# Altium PCB NonRGB-v1.PcbDoc (part 2 of 2)
Units mil, origin at the board's own origin, x right, y up, seen from the top; angles counter-clockwise.
Board outline 14224 x 14224 mil, 4 copper layers (Top Layer, Internal Plane 1, Internal Plane 2, Bottom Layer), stack 18.2 mil thick; 328 components, 111 nets, 825 pads, 445 vias.
Unrouted connection lines stored in the file: 71.
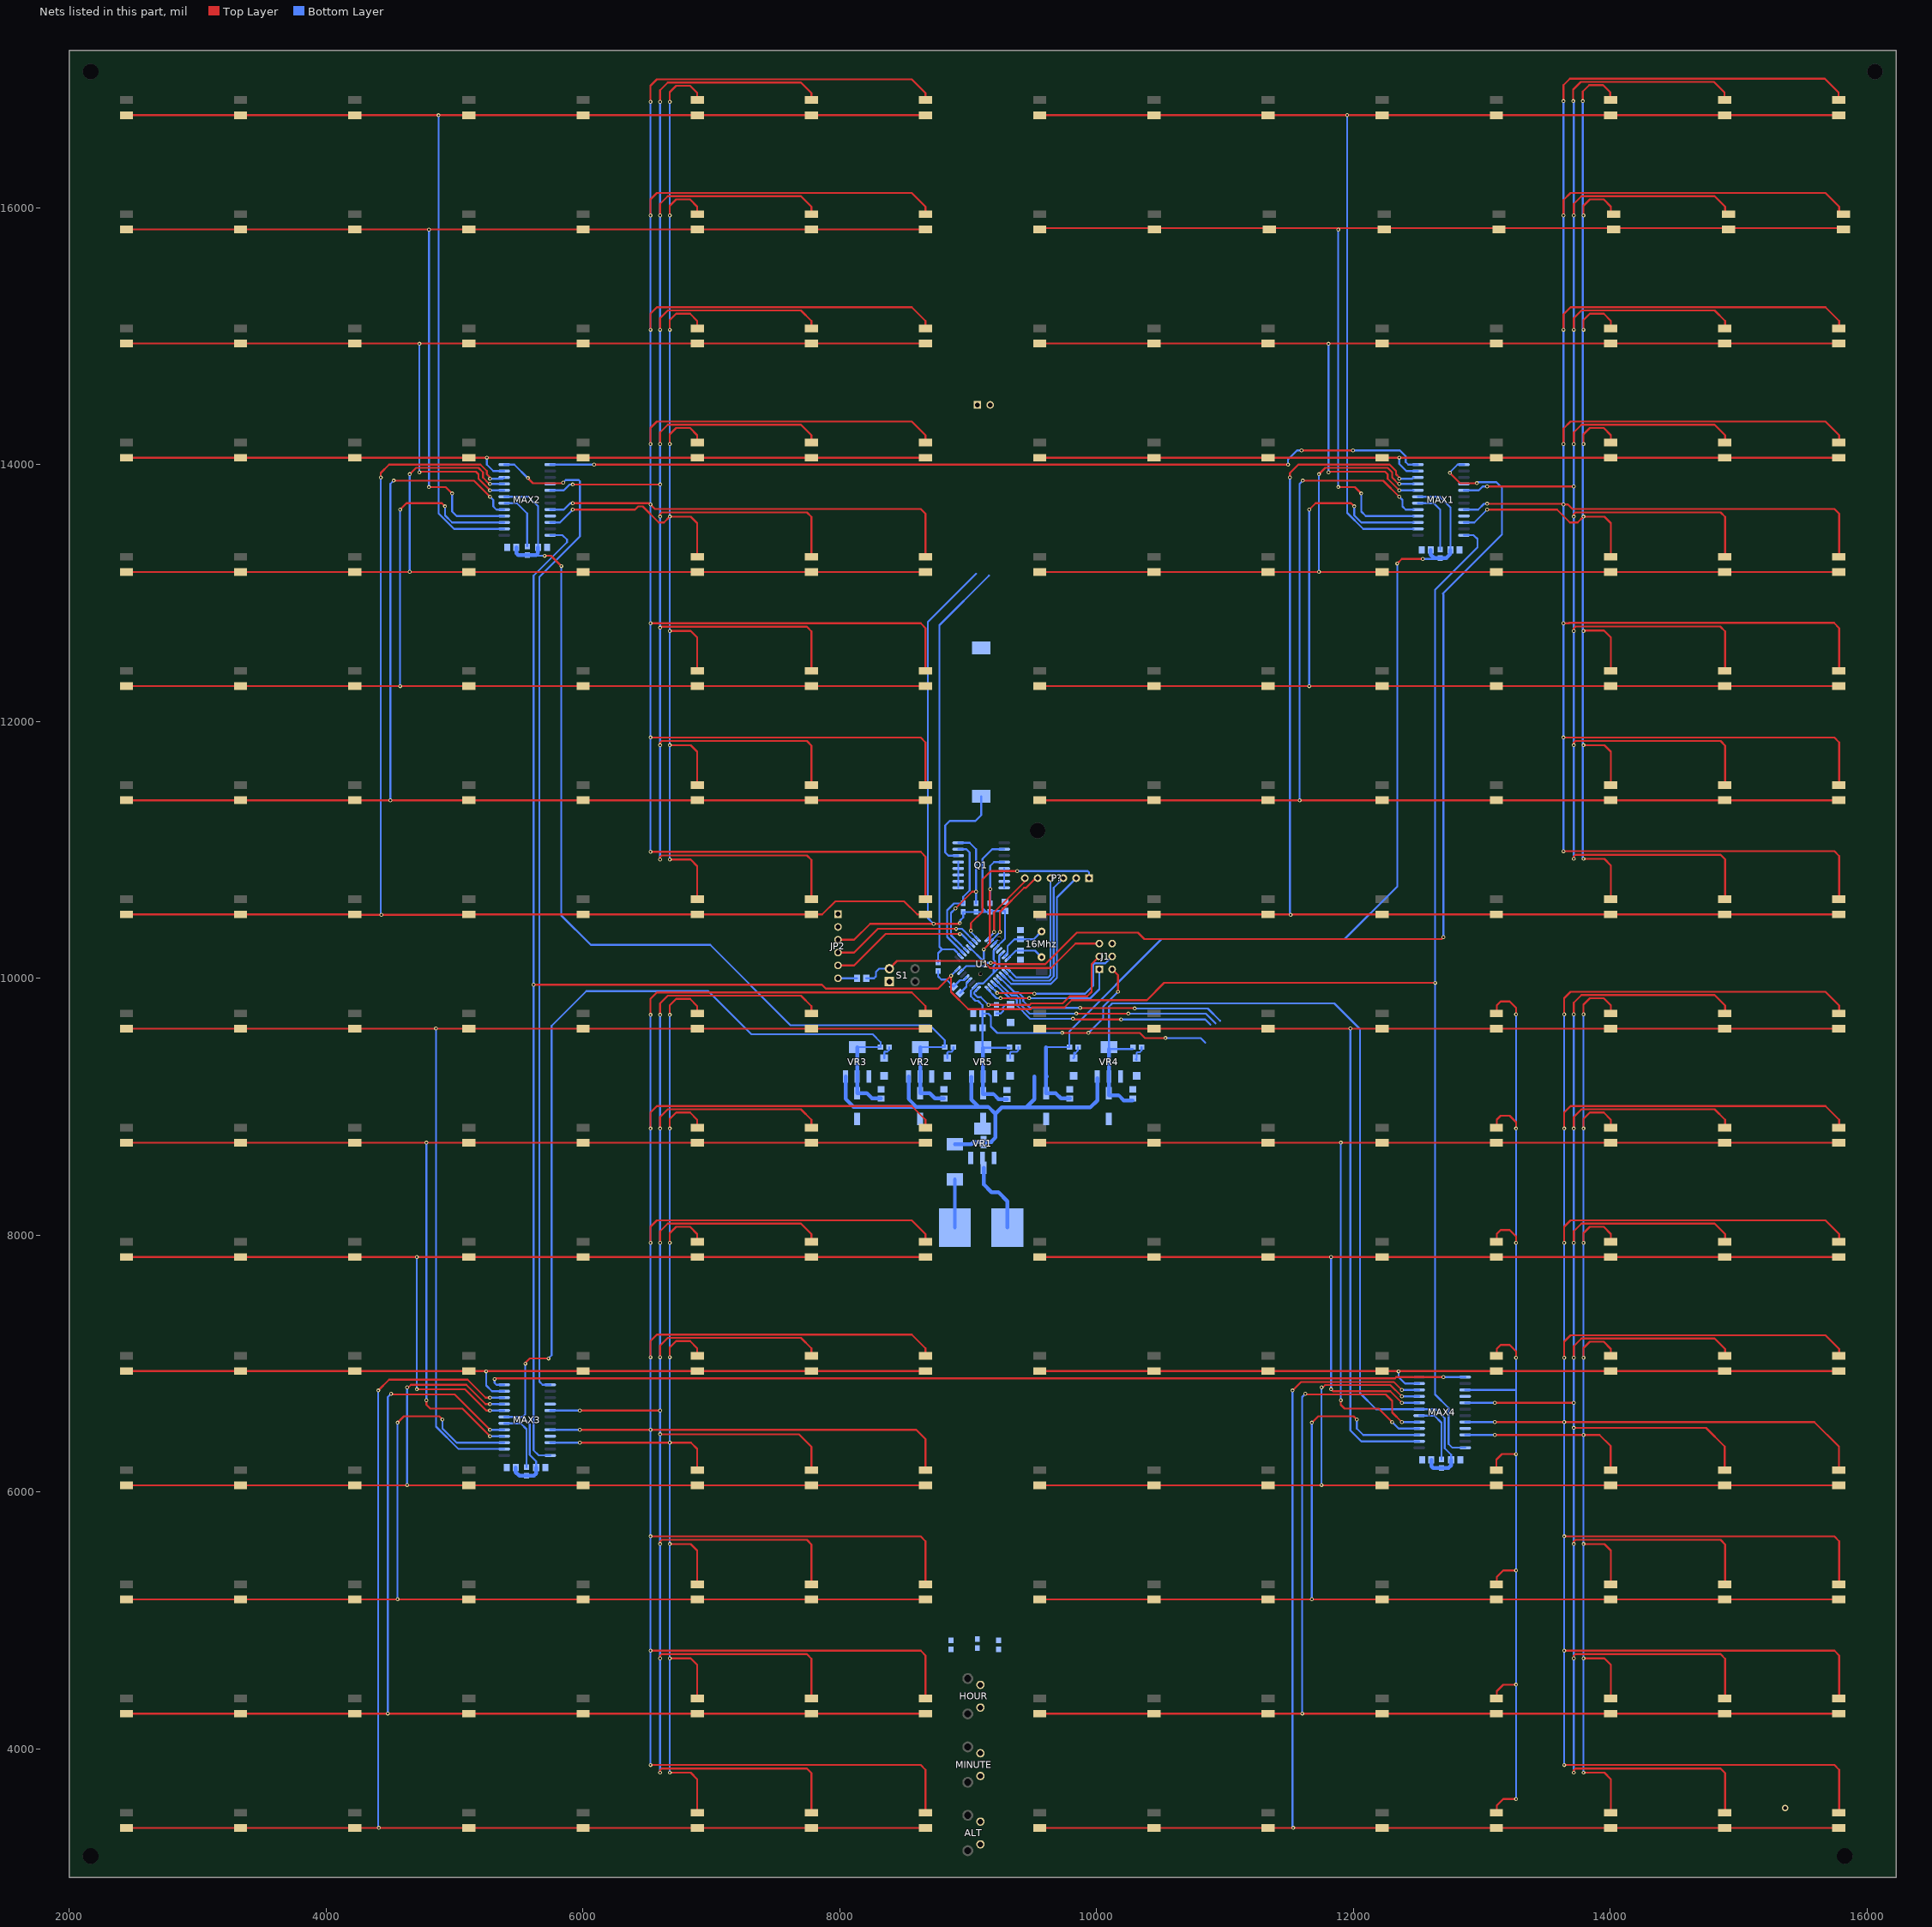
[diagram p4: the nets of this part, all layers, seen from the top]

## Via types
v1: diameter 30, hole 15, Top Layer to Bottom Layer, 442 vias
v2: diameter 30, hole 28, Top Layer to Bottom Layer, 2 vias
v3: diameter 50, hole 28, Top Layer to Bottom Layer, 1 vias

## Nets (pads, with @x,y where several pads share a name; then routed paths per layer and width w, separated by ;. In a path a pad name is that pad's centre, name@x,y a point inside that pad or via, vN(x,y) a via of type N, cw(c..) or ccw(c..) an arc to the next point about the centre after c; other vN are vias at no path point) (continued)
DIG4C: LED197.2 LED205.2 LED213.2 LED221.2 LED229.2 LED237.2 LED245.2 LED253.2 MAX4.3 | length 8591.9
  Top Layer w15: LED229.2@13112,6170.56 13112,6252 13155,6295 v1(13265,6295) ; LED253.2@13115,3505.56 13115,3560 13165,3610 v1(13265,3610) ; LED245.2@13115,4395.56 13115,4450 13165,4500 v1(13265,4500) ; LED237.2@13115,5285.56 13115,5340 13165,5390 v1(13265,5390) ; LED221.2@13115,7058.56 13115,7115 13145,7145 13215,7145 13265,7095 v1(13265,7045) ; LED213.2@13115,7953.56 13115,8010 13145,8040 13215,8040 13265,7990 v1(13265,7940) ; LED205.2@13115,8843.56 13115,8900 13145,8930 13215,8930 13265,8880 v1(13265,8830) ; LED197.2@13115,9733.56 13115,9790 13145,9820 13215,9820 13265,9770 v1(13265,9720)
  Bottom Layer w15: MAX4.3@12869.13,6795 13265,6795 ; v1(13265,3610) v1(13265,4500) v1(13265,5390) v1(13265,6295) 13265,6795 ; v1(13265,9720) v1(13265,8830) v1(13265,7940) v1(13265,7045) 13265,6795
DIG5: LED6.2 LED14.2 LED22.2 LED30.2 LED38.2 LED46.2 LED54.2 LED62.2 MAX1.10 | length 10457.1
  Top Layer w15: v1(13040,13650) 13585,13650 13685,13550 13745,13550 v1(13790,13595) 13953,13595 14004,13544 LED38.2@14004,13285.56 ; v1(13785,16830) 13785,16905 13835,16955 13943,16955 13999,16899 LED6.2@13999,16843.56 ; v1(13790,10930) 13953,10930 14004,10879 LED62.2@14004,10620.56 ; v1(13790,11815) 13953,11815 14004,11764 LED54.2@14004,11505.56 ; v1(13790,12705) 13792.5,12707.5 13950.5,12707.5 14004,12654 LED46.2@14004,12395.56 ; v1(13790,14160) 13790,14235 13840,14285 13948,14285 14004,14229 LED30.2@14004,14173.56 ; v1(13790,15050) 13790,15125 13840,15175 13948,15175 14004,15119 LED22.2@14004,15063.56 ; v1(13790,15940) 13790,16015 13840,16065 13948,16065 14004,16009 LED14.2@14004,15953.56
  Bottom Layer w15: MAX1.10@12859.13,13550 12940,13550 v1(13040,13650) ; v1@13785,10935 v1(13785,16830)
DIG5A: LED70.2 LED78.2 LED86.2 LED94.2 LED102.2 LED110.2 LED118.2 LED126.2 MAX2.10 | length 10480.7
  Top Layer w15: v1(5920,13650) 6405,13650 6430,13675 6465,13675 6590,13550 6630,13550 v1(6675,13595) 6838,13595 6889,13544 LED102.2@6889,13285.56 ; v1(6675,10925) 6838,10925 6889,10874 LED126.2@6889,10615.56 ; v1(6675,11815) 6838,11815 6889,11764 LED118.2@6889,11505.56 ; v1(6675,12705) 6838,12705 6889,12654 LED110.2@6889,12395.56 ; v1(6675,14160) 6675,14235 6725,14285 6833,14285 6889,14229 LED94.2@6889,14173.56 ; v1(6675,15050) 6675,15125 6725,15175 6833,15175 6889,15119 LED86.2@6889,15063.56 ; v1(6675,15940) 6675,16015 6725,16065 6833,16065 6889,16009 LED78.2@6889,15953.56 ; v1(6675,16825) 6675,16900 6725,16950 6833,16950 6889,16894 LED70.2@6889,16838.56
  Bottom Layer w15: MAX2.10@5744.13,13550 5820,13550 v1(5920,13650) ; v1(6675,10925) v1(6675,11815) v1(6675,12705) v1(6675,13595) v1(6675,14160) v1(6675,15050) v1(6675,15940) v1(6675,16825)
DIG5B: LED134.2 LED142.2 LED150.2 LED158.2 LED166.2 LED174.2 LED182.2 LED190.2 MAX3.10 | length 10264.7
  Top Layer w15: v1(5975,6385) v1(6675,6385) 6840,6385 6889,6336 LED166.2@6889,6170.56 ; v1(6675,3815) 6838,3815 6889,3764 LED190.2@6889,3505.56 ; v1(6675,4705) 6838,4705 6889,4654 LED182.2@6889,4395.56 ; v1(6675,5595) 6838,5595 6889,5544 LED174.2@6889,5285.56 ; v1(6675,7050) 6675,7125 6725,7175 6833,7175 6889,7119 LED158.2@6889,7063.56 ; v1(6675,7940) 6675,8015 6725,8065 6833,8065 6889,8009 LED150.2@6889,7953.56 ; v1(6675,8830) 6675,8905 6725,8955 6833,8955 6889,8899 LED142.2@6889,8843.56 ; v1(6675,9715) 6675,9790 6725,9840 6833,9840 6889,9784 LED134.2@6889,9728.56
  Bottom Layer w15: MAX3.10@5744.13,6385 v1(5975,6385) ; v1(6675,3815) v1(6675,4705) v1(6675,5595) v1(6675,6385) v1(6675,7050) v1(6675,7940) v1(6675,8830) v1(6675,9715)
DIG5C: LED198.2 LED206.2 LED214.2 LED222.2 LED230.2 LED238.2 LED246.2 LED254.2 MAX4.10 | length 10295
  Top Layer w15: v1(13100,6445) v1(13790,6445) 13915,6445 14001,6359 LED230.2@14001,6170.56 ; v1(13790,3815) 13953,3815 14004,3764 LED254.2@14004,3505.56 ; v1(13790,4705) 13953,4705 14004,4654 LED246.2@14004,4395.56 ; v1(13790,5595) 13953,5595 14004,5544 LED238.2@14004,5285.56 ; v1(13790,7045) 13790,7120 13840,7170 13948,7170 14004,7114 LED222.2@14004,7058.56 ; v1(13790,7940) 13790,8015 13840,8065 13948,8065 14004,8009 LED214.2@14004,7953.56 ; v1(13790,8830) 13790,8905 13840,8955 13948,8955 14004,8899 LED206.2@14004,8843.56 ; v1(13790,9720) 13790,9795 13840,9845 13948,9845 14004,9789 LED198.2@14004,9733.56
  Bottom Layer w15: MAX4.10@12869.13,6445 v1(13100,6445) ; v1(13790,3815) v1(13790,4705) v1(13790,5595) v1(13790,6445) v1(13790,7045) v1(13790,7940) v1(13790,8830) v1(13790,9720)
DIG6: LED7.2 LED15.2 LED23.2 LED31.2 LED39.2 LED47.2 LED55.2 LED63.2 MAX1.5 | length 18387.7
  Top Layer w15: v1(13040,13830) v1(13715,13830) ; v1(13710,16830) 13710,16920 13770,16980 14806,16980 14888,16898 LED7.2@14888,16843.56 ; v1(13715,10930) 13715,10950 13727.5,10962.5 14857.5,10962.5 14893,10927 LED63.2@14893,10620.56 ; v1(13715,11815) 13715,11835 13727.5,11847.5 14857.5,11847.5 14893,11812 LED55.2@14893,11505.56 ; v1(13715,12705) 13715,12725 13730,12740 14855,12740 14893,12702 LED47.2@14893,12395.56 ; v1(13715,13595) 13715,13615 13727.5,13627.5 14857.5,13627.5 14893,13592 LED39.2@14893,13285.56 ; v1(13715,14160) 13715,14250 13775,14310 14811,14310 14893,14228 LED31.2@14893,14173.56 ; v1(13715,15050) 13715,15140 13775,15200 14811,15200 14893,15118 LED23.2@14893,15063.56 ; v1(13715,15940) 13715,16030 13775,16090 14811,16090 14893,16008 LED15.2@14893,15953.56
  Bottom Layer w15: MAX1.5@12859.13,13800 12975,13800 13005,13830 v1(13040,13830) ; v1(13715,10930) v1(13715,11815) v1(13715,12705) v1(13715,13595) v1(13715,13830) v1(13715,14160) v1(13715,15050) v1(13715,15940) v1@13715,16825
DIG6A: LED71.2 LED79.2 LED87.2 LED95.2 LED103.2 LED111.2 LED119.2 LED127.2 MAX2.5 | length 18379.8
  Top Layer w15: v1(5920,13845) v1(6600,13845) ; v1(6600,10925) 6600,10945 6612.5,10957.5 7742.5,10957.5 7778,10922 LED127.2@7778,10615.56 ; v1(6600,11815) 6600,11835 6612.5,11847.5 7742.5,11847.5 7778,11812 LED119.2@7778,11505.56 ; v1@6600,12725 v1(6600,12730) 6605,12730 6612.5,12737.5 7742.5,12737.5 7778,12702 LED111.2@7778,12395.56 ; v1(6600,13595) 6600,13615 6612.5,13627.5 7742.5,13627.5 7778,13592 LED103.2@7778,13285.56 ; v1(6600,14160) 6600,14250 6660,14310 7696,14310 7778,14228 LED95.2@7778,14173.56 ; v1(6600,15050) 6600,15140 6660,15200 7696,15200 7778,15118 LED87.2@7778,15063.56 ; v1(6600,15940) 6600,16030 6660,16090 7696,16090 7778,16008 LED79.2@7778,15953.56 ; v1(6600,16825) 6600,16915 6660,16975 7696,16975 7778,16893 LED71.2@7778,16838.56
  Bottom Layer w15: MAX2.5@5744.13,13800 5850,13800 5895,13845 v1(5920,13845) ; v1(6600,10925) v1(6600,11815) v1(6600,12730) v1(6600,13595) v1(6600,13845) v1(6600,14160) v1(6600,15050) v1(6600,15940) v1(6600,16825)
DIG6B: LED135.2 LED143.2 LED151.2 LED159.2 LED167.2 LED175.2 LED183.2 LED191.2 MAX3.5 | length 18254.5
  Top Layer w15: v1(5975,6635) v1(6600,6635) ; v1(6600,3815) 6600,3835 6612.5,3847.5 7742.5,3847.5 7778,3812 LED191.2@7778,3505.56 ; v1(6600,4705) 6600,4725 6612.5,4737.5 7742.5,4737.5 7778,4702 LED183.2@7778,4395.56 ; v1(6600,5595) 6600,5615 6612.5,5627.5 7742.5,5627.5 7778,5592 LED175.2@7778,5285.56 ; v1(6600,6450) 7681,6450 7778,6353 LED167.2@7778,6170.56 ; v1(6600,7050) 6600,7140 6660,7200 7696,7200 7778,7118 LED159.2@7778,7063.56 ; v1(6600,7940) 6600,8030 6660,8090 7696,8090 7778,8008 LED151.2@7778,7953.56 ; v1(6600,8830) 6600,8920 6660,8980 7696,8980 7778,8898 LED143.2@7778,8843.56 ; v1(6600,9715) 6600,9805 6660,9865 7696,9865 7778,9783 LED135.2@7778,9728.56
  Bottom Layer w15: MAX3.5@5744.13,6635 v1(5975,6635) ; v1(6600,3815) v1(6600,4705) v1(6600,5595) v1(6600,6450) v1(6600,6635) v1(6600,7050) v1(6600,7940) v1(6600,8830) v1(6600,9715)
DIG6C: LED199.2 LED207.2 LED215.2 LED223.2 LED231.2 LED239.2 LED247.2 LED255.2 MAX4.5 | length 18268.4
  Top Layer w15: v1(13100,6695) v1(13715,6695) ; v1(13715,3815) 13715,3835 13727.5,3847.5 14857.5,3847.5 14893,3812 LED255.2@14893,3505.56 ; v1(13715,4705) 13715,4725 13727.5,4737.5 14857.5,4737.5 14893,4702 LED247.2@14893,4395.56 ; v1(13715,5595) 13715,5615 13727.5,5627.5 14857.5,5627.5 14893,5592 LED239.2@14893,5285.56 ; v1(13715,6500) 14745,6500 14890,6355 LED231.2@14890,6170.56 ; v1(13715,7045) 13715,7135 13775,7195 14811,7195 14893,7113 LED223.2@14893,7058.56 ; v1(13715,7940) 13715,8030 13775,8090 14811,8090 14893,8008 LED215.2@14893,7953.56 ; v1(13715,8830) 13715,8920 13775,8980 14811,8980 14893,8898 LED207.2@14893,8843.56 ; v1(13715,9720) 13715,9810 13775,9870 14811,9870 14893,9788 LED199.2@14893,9733.56
  Bottom Layer w15: MAX4.5@12869.13,6695 v1(13100,6695) ; v1(13715,3815) v1(13715,4705) v1(13715,5595) v1(13715,6500) v1(13715,6695) v1(13715,7045) v1(13715,7940) v1(13715,8830) v1(13715,9720)
DIG7: LED8.2 LED16.2 LED24.2 LED32.2 LED40.2 LED48.2 LED56.2 LED64.2 MAX1.8 | length 26187
  Top Layer w15: v1(13040,13695) 13630,13695 v1(13635,13690) 13670,13690 13705,13655 15744,13655 15782,13617 LED40.2@15782,13285.56 ; v1(13635,10990) 15744,10990 15782,10952 LED64.2@15782,10620.56 ; v1(13635,11875) 15744,11875 15782,11837 LED56.2@15782,11505.56 ; v1(13635,12765) 13680,12765 13677.5,12767.5 15741.5,12767.5 15782,12727 LED48.2@15782,12395.56 ; v1(13635,14160) 13635,14280 13690,14335 15675,14335 15782,14228 LED32.2@15782,14173.56 ; v1(13635,15050) 13635,15170 13690,15225 15675,15225 15782,15118 LED24.2@15782,15063.56 ; v1(13635,15940) 13635,16060 13690,16115 15675,16115 15782,16008 LED16.2@15782,15953.56 ; v1(13635,16830) 13635,16955 13685,17005 15670,17005 15777,16898 LED8.2@15777,16843.56
  Bottom Layer w15: MAX1.8@12859.13,13650 12970,13650 13015,13695 v1(13040,13695) ; v1(13635,10990) v1(13635,13690) v1(13635,16830)
DIG7A: LED72.2 LED80.2 LED88.2 LED96.2 LED104.2 LED112.2 LED120.2 LED128.2 MAX2.8 | length 26162.9
  Top Layer w15: v1(5920,13700) 6515,13700 6560,13655 8629,13655 8667,13617 LED104.2@8667,13285.56 ; v1(6525,10985) 6570,10985 8629,10985 8667,10947 LED128.2@8667,10615.56 ; v1(6525,11875) 8629,11875 8667,11837 LED120.2@8667,11505.56 ; v1(6525,12765) 8629,12765 8667,12727 LED112.2@8667,12395.56 ; v1(6525,14160) 6525,14285 6575,14335 8560,14335 8667,14228 LED96.2@8667,14173.56 ; v1(6525,15050) 6525,15175 6575,15225 8560,15225 8667,15118 LED88.2@8667,15063.56 ; v1(6525,15940) 6525,16065 6575,16115 8560,16115 8667,16008 LED80.2@8667,15953.56 ; v1(6525,16825) 6525,16950 6575,17000 8560,17000 8667,16893 LED72.2@8667,16838.56
  Bottom Layer w15: MAX2.8@5744.13,13650 5850,13650 5900,13700 v1(5920,13700) ; v1(6525,10985) v1(6525,11875) v1(6525,12765) v1(6525,14160) v1(6525,15050) v1(6525,15940) v1(6525,16825)
  other v1: 6525,13690
DIG7B: LED136.2 LED144.2 LED152.2 LED160.2 LED168.2 LED176.2 LED184.2 LED192.2 MAX3.8 | length 26048.6
  Top Layer w15: v1(5975,6485) v1(6525,6485) 8595,6485 8667,6413 LED168.2@8667,6170.56 ; v1(6525,3875) 8629,3875 8667,3837 LED192.2@8667,3505.56 ; v1(6525,4765) 8629,4765 8667,4727 LED184.2@8667,4395.56 ; v1(6525,5655) 8629,5655 8667,5617 LED176.2@8667,5285.56 ; v1(6525,7050) 6525,7175 6575,7225 8560,7225 8667,7118 LED160.2@8667,7063.56 ; v1(6525,7940) 6525,8065 6575,8115 8560,8115 8667,8008 LED152.2@8667,7953.56 ; v1(6525,8830) 6525,8955 6575,9005 8560,9005 8667,8898 LED144.2@8667,8843.56 ; v1(6525,9715) 6525,9840 6575,9890 8560,9890 8667,9783 LED136.2@8667,9728.56
  Bottom Layer w15: MAX3.8@5744.13,6485 v1(5975,6485) ; v1(6525,3875) v1(6525,4765) v1(6525,5655) v1(6525,6485) v1(6525,7050) v1(6525,7940) v1(6525,8830) v1(6525,9715)
DIG7C: LED200.2 LED208.2 LED216.2 LED224.2 LED232.2 LED240.2 LED248.2 LED256.2 MAX4.8 | length 26030.9
  Top Layer w15: v1(13100,6545) v1(13640,6545) 15588,6545 15779,6354 LED232.2@15779,6170.56 ; v1(13640,3875) 15744,3875 15782,3837 LED256.2@15782,3505.56 ; v1(13640,4765) 15744,4765 15782,4727 LED248.2@15782,4395.56 ; v1(13640,5655) 15744,5655 15782,5617 LED240.2@15782,5285.56 ; v1(13640,7045) 13640,7170 13690,7220 15675,7220 15782,7113 LED224.2@15782,7058.56 ; v1(13640,7940) 13640,8065 13690,8115 15675,8115 15782,8008 LED216.2@15782,7953.56 ; v1(13640,8830) 13640,8955 13690,9005 15675,9005 15782,8898 LED208.2@15782,8843.56 ; v1(13640,9720) 13640,9845 13690,9895 15675,9895 15782,9788 LED200.2@15782,9733.56
  Bottom Layer w15: MAX4.8@12869.13,6545 v1(13100,6545) ; v1(13640,3875) v1(13640,4765) v1(13640,5655) v1(13640,6545) v1(13640,7045) v1(13640,7940) v1(13640,8830) v1(13640,9720)
DIN01: MAX1.1 U1.23 | length 8212.3
  Top Layer w15: v1(9175,10120) 9210,10120 9220,10110 9600,10110 9845,10355 10320,10355 10370,10305 12685,10305 v1(12700,10320) ; v1(12750,13935) 12830,13855 v1(12960,13855)
  Bottom Layer w15: U1.23@8939.4,10050.75 8983.64,10095 9125.96,10095 9150.96,10120 v1(9175,10120) ; v1(12700,10320) 12700,12990 12695,12995 13155,13455 13155,13820 13112.5,13862.5 12967.5,13862.5 v1(12960,13855) ; v1(12750,13935) 12750,13940 12810,14000 MAX1.1@12859.13,14000
DTR: C8.1 JP2.6 | length 149.6
  Bottom Layer w15: JP2.6@7985,10000 C8.1@8134.57,10000
GND: BATTERY.2 C1.1 C2.1 C3.1 C4.1 C5.1 C6.2 C7.2 C9.1 C10.1 C11.2 C12.2 C13.2 C14.2 C15.2 C16.2 C17.2 C18.2 C19.2 C20.2 Cp1.2 Cp2.2 Cp3.2 Cp4.2 Cp5.2 Cp6.2 J1.6 JP2.1 JP2.2 LED_01.2 LED_02.2 LED_03.2 LED_04.2 LED_05.2 LED_06.2 MAX1.4 MAX1.9 MAX2.4 MAX2.9 MAX3.4 MAX3.9 MAX4.4 MAX4.9 PowerIn.2 Q1.5 Q1.6 Q1.7 Q1.8 Q1.9 Q1.10 Q1.11 Q1.12 Q1.13 R10.1 R11.1 R12.1 R13.1 S1.1 U1.3 U1.5 U1.21 VR1.1 VR2.1 VR3.1 VR4.1 VR5.1 | length 1318.5
  Bottom Layer w15: R10.1@8765,10056.54 8765,10015 8790,9990 8830,9990 C10.1@8884.94,9935.05 8934.74,9984.85 8967.06,9984.85 8979.46,9997.25 8979.46,10006.21 U1.21@8983.94,10006.21 ; Q1.9@8920.87,10705 Q1.10@8920.87,10755 Q1.11@8920.87,10805 Q1.12@8920.87,10855 Q1.13@8920.87,10905 ; U1.3@9195.52,10262.33 9195.52,10265.52 v2(9240,10310) ; Q1.8@9279.13,10705 Q1.7@9279.13,10755 Q1.6@9279.13,10805 Q1.5@9279.13,10855
  Bottom Layer w30: Cp6.2@9119.38,8525 9119.38,8395.62 9180,8335 9235,8335 9305,8265 PowerIn.2@9305,8060
  other v2: 9095,10035
  other v3: 15360,3540
ISET: MAX1.18 Rset01.2 | length 506.4
  Bottom Layer w15: MAX1.18@12500.87,13700 12625,13700 12675,13650 Rset01.2@12675,13338.46
ISET2: MAX2.18 Rset02.2 | length 464.7
  Bottom Layer w15: MAX2.18@5390,13700 5485,13700 5565,13620 Rset02.2@5565,13363.46
ISET3: MAX3.18 Rset03.2 | length 489.3
  Bottom Layer w15: MAX3.18@5385.87,6535 5515,6535 5560,6490 Rset03.2@5560,6193.46
ISET4: MAX4.18 Rset04.2 | length 483.5
  Bottom Layer w15: MAX4.18@12510.87,6595 12630,6595 12685,6540 Rset04.2@12685,6253.46
LDR: Photo.2 R10.2 U1.26 | length 3357.6
  Bottom Layer w15: R10.2@8765,10123.46 8765,10195 8795,10225 ; U1.26@8939.4,10173.25 8887.64,10225 8795,10225 ; 9160,13135 8775,12750 8775,10245 8795,10225
LOAD: MAX1.12 MAX2.12 MAX3.12 MAX4.12 U1.24 | length 22388.1
  Top Layer w15: v1(5615,9950) 7860,9950 7890,9920 8765,9920 v1(8865,10020) 8865,9895 9000,9760 9483.99,9760 9497.57,9773.58 9748.58,9773.58 9805,9830 10390,9830 10525,9965 v1(12635,9965)
  Bottom Layer w15: MAX3.12@5744.13,6285 5655,6285 5615,6325 v1(5615,9950) 5615,13135 5875,13395 5875,13415 5840,13450 MAX2.12@5744.13,13450 ; v1(8865,10020) 8865,10020.9 U1.24@8917.13,10073.03 ; MAX1.12@12859.13,13450 12935,13450 12965,13420 12965,13355 12635,13025 v1(12635,9965) 12635,6760 12740,6655 12740,6375 12770,6345 MAX4.12@12869.13,6345
MISO: J1.1 U1.16 | length 1085.3
  Top Layer w15: v1(9250,9845) v1(9475,9845)
  Bottom Layer w15: U1.16@9150.97,9917.13 9150.97,9913.06 9219.04,9845 v1(9250,9845) ; v1(9475,9845) 9950,9845 10020,9915 J1.1@10020,10070
MOSI: J1.4 U1.15 | length 1189
  Top Layer w15: v1(9225,9885) 9510,9885 v1(9515,9880)
  Bottom Layer w15: U1.15@9173.25,9939.4 9225,9887.64 v1(9225,9885) ; v1(9515,9880) 9910,9880 9972.97,9942.97 9972.97,10106.78 9983.22,10117.03 10067.03,10117.03 J1.4@10120,10170
NetBAT1_1: BATTERY.1 Q1.14 | length 782.4
  Bottom Layer w15: Q1.14@8920.87,10955 8845,10955 8820,10980 8820,11190 8855,11225 9055,11225 9100,11270 BATTERY.1@9100,11418
NetC10_2: C10.2 U1.20 | length 128.5
  Bottom Layer w15: C10.2@8935.05,9884.94 8984.85,9934.74 8984.85,9958.09 9006.21,9979.46 U1.20@9006.21,9983.94
NetC11_1: 16Mhz.1 C11.1 U1.7 | length 397.8
  Bottom Layer w15: U1.7@9284.6,10173.25 9284.6,10177.73 9305.97,10199.09 9305.97,10250.97 9359.57,10304.57 C11.1@9405,10304.57 9509.57,10304.57 16Mhz.1@9570,10365
NetC12_1: 16Mhz.2 C12.1 U1.8 | length 311.2
  Bottom Layer w15: U1.8@9306.87,10150.97 9306.87,10151.87 9370.43,10215.43 C12.1@9405,10215.43 9405.43,10215 9520,10215 16Mhz.2@9570,10165
NetD1_1: D1.1 PowerIn.1 | length 374.6
  Bottom Layer w30: PowerIn.1@8895,8060 D1.1@8895,8434.61
NetLED_01_1: LED_01.1 R1.1 | length 106.3
  Bottom Layer w15: LED_01.1@9818.75,9378.9 9825,9385.15 9825,9420 9835,9420 9853.46,9438.46 R1.1@9853.46,9465
NetLED_02_1: LED_02.1 R2.1 | length 120.3
  Bottom Layer w15: LED_02.1@8836.25,9378.9 8836.25,9421.25 8842.81,9427.81 8867.81,9427.81 8883.46,9443.46 R2.1@8883.46,9465
NetLED_03_1: LED_03.1 R3.1 | length 113.8
  Bottom Layer w15: LED_03.1@8345,9378.9 8345,9425 8348.69,9428.69 8368.69,9428.69 8383.46,9443.46 R3.1@8383.46,9465
NetLED_04_1: LED_04.1 R4.1 | length 120.8
  Bottom Layer w15: LED_04.1@10305,9368.9 LED_04.1@10310,9363.9 ; LED_04.1@10310,9378.9 10310,9420 10315,9425 10335,9425 10348.46,9438.46 R4.1@10348.46,9465
NetLED_05_1: LED_05.1 R5.1 | length 138.8
  Bottom Layer w15: LED_05.1@9325,9378.9 9325,9420 9332.81,9427.81 9377.81,9427.81 9388.46,9438.46 R5.1@9388.46,9465
NetLED_06_1: LED_06.1 R6.2 | length 154.6
  Bottom Layer w15: R6.2@9220,9726.54 9251.54,9726.54 9270,9745 9270,9773.46 9290.43,9793.9 LED_06.1@9330,9793.9
NetMAX1_24: MAX1.24 MAX2.1 | length 6897.7
  Top Layer w15: v1(6085,14000) v1(11490,14000) ; v1(11595,14110) v1(11995,14110)
  Bottom Layer w15: MAX2.1@5744.13,14000 v1(6085,14000) ; v1(11490,14000) 11490,14040 11560,14110 v1(11595,14110) ; v1(11995,14110) 12360,14110 12405,14065 12405,14020 12425,14000 MAX1.24@12500.87,14000
NetMAX2_24: MAX2.24 MAX3.1 | length 7901.6
  Top Layer w15: v1(5570,13895) 5610,13855 5845,13855 v1(5845,13860)
  Bottom Layer w15: MAX2.24@5385.87,14000 5465,14000 v1(5570,13895) ; MAX3.1@5744.13,6835 5685,6835 5660,6860 5660,13125 5975,13440 5975,13870 5965,13880 5865,13880 v1(5845,13860)
NetMAX3_24: MAX3.24 MAX4.1 | length 7677.4
  Top Layer w15: v1(5310,6880) 5315,6885 12322.5,6885 12332.5,6895 v1(12700,6895)
  Bottom Layer w15: v1(5310,6880) 5310,6850 5325,6835 MAX3.24@5385.87,6835 ; v1(12700,6895) MAX4.1@12869.13,6895
PIN1: P?.6 U1.1 | length 592.8
  Top Layer w15: v1(9200,10360) 9200,10515 9440,10755 P?.6@9440,10780
  Bottom Layer w15: U1.1@9150.97,10306.87 9200,10355.9 v1(9200,10360)
PIN2: P?.5 U1.2 | length 664.9
  Top Layer w15: v1(9245.96,10360) 9245.96,10515.96 9435,10705 9450,10705 9525,10780 P?.5@9540,10780
  Bottom Layer w15: U1.2@9173.25,10284.6 9173.25,10287.28 v1(9245.96,10360)
PIN9: P?.4 U1.9 | length 1122.5
  Bottom Layer w15: U1.9@9306.87,10073.03 9372.4,10007.5 9622.5,10007.5 9640,10025 P?.4@9640,10780
PIN10: P?.3 U1.10 | length 1218.4
  Bottom Layer w15: U1.10@9284.6,10050.75 9352.86,9982.5 9632.86,9982.5 9665,10014.64 9665,10705 P?.3@9740,10780
PIN11: P?.2 U1.11 | length 1314.3
  Bottom Layer w15: U1.11@9262.33,10028.48 9333.31,9957.5 9643.21,9957.5 9690,10004.29 9690,10630 P?.2@9840,10780
PIN12: HOUR.2 R11.2 U1.12 | length 1875.8
  Top Layer w15: v1(9870,9770) 9872.5,9767.5 10292.5,9767.5 v1(10295,9765)
  Bottom Layer w15: U1.12@9240.06,10006.21 9243.79,10006.21 9359.07,9890.93 9387.49,9890.93 9427.03,9851.38 9427.03,9822.97 9480,9770 v1(9870,9770) ; v1(10295,9765) 10865,9765 10960,9670
PIN13: MINUTE.2 R12.2 U1.13 | length 1869.7
  Top Layer w15: v1(9840,9725) v1(10245,9725)
  Bottom Layer w15: U1.13@9217.79,9983.94 9335.8,9865.93 9377.13,9865.93 9402.03,9841.03 9402.03,9799.7 9476.73,9725 v1(9840,9725) ; v1(10245,9725) 10850,9725 10925,9650
PIN14: ALT.2 R13.2 U1.14 | length 1852.2
  Top Layer w15: v1(9815,9685) 9820,9680 v1(10190,9680)
  Bottom Layer w15: U1.14@9195.52,9961.67 9200,9961.67 9200,9952.71 9212.4,9940.3 9226.07,9940.3 9325.45,9840.93 9366.78,9840.93 9377.03,9830.67 9377.03,9789.35 9481.37,9685 v1(9815,9685) ; v1(10190,9680) 10845,9680 10885,9640
PIN32: P?.1 U1.32 | length 1428.4
  Top Layer w15: v1(9020,10370) 9020,10430 9110,10520 9110,10770 9175,10835 v1(9380,10835)
  Bottom Layer w15: v1(9020,10370) 9020,10359.9 U1.32@9073.03,10306.87 ; v1(9380,10835) 9930,10835 9940,10825 P?.1@9940,10780
RESET: C8.2 J1.5 Q1.4 R9.2 S1.2 U1.29 | length 3154.1
  Top Layer w15: S1.2@8385,10075 8445,10135 v1(9120,10135) 9120,10129.04 9169.04,10080 9645,10080 9835,10270 J1.5@10020,10270 ; v1(9120,10225) 9167.5,10272.5 9167.5,10692.5 v1(9170,10695) v1@9175,10700
  Bottom Layer w15: C8.2@8205.43,10000 8265,10000 8280,10015 8280,10050 8305,10075 S1.2@8385,10075 ; U1.29@9006.21,10240.06 9010.69,10240.06 9115.75,10135 v1(9120,10135) v1(9120,10225) ; R9.2@9170,10583.46 v1(9170,10695) 9170,10875 9200,10905 Q1.4@9279.13,10905
RX: JP2.5 U1.30 | length 1186.3
  Top Layer w15: JP2.5@7985,10100 8110,10100 8355,10345 v1(8935,10345) v1@8930,10350
  Bottom Layer w15: v1(8935,10345) 8945,10345 9027.67,10262.33 U1.30@9028.48,10262.33
SCK: J1.3 R6.1 U1.17 | length 1405
  Top Layer w15: v1(9156.54,9793.46) 9478.46,9793.46 9490,9805 9735,9805 9790,9860 9925,9860 9960,9895 9960,10110 J1.3@10020,10170
  Bottom Layer w15: U1.17@9073.03,9917.13 9045,9889.1 9045,9880 9072.5,9852.5 9097.5,9852.5 v1(9156.54,9793.46) R6.1@9220,9793.46
SCL: Q1.16 R7.2 U1.28 | length 1187.2
  Top Layer w15: v1(8900,10545) 9030,10675 v1(9060,10675)
  Bottom Layer w15: v1(8900,10545) 8865,10510 8865,10335 8908.27,10291.73 8910,10291.73 U1.28@8983.94,10217.79 ; Q1.16@8920.87,11055 9010,11055 9060,11005 v1(9060,10675) R7.2@9060,10583.46
SDA: Q1.15 R8.1 U1.27 | length 1050.8
  Bottom Layer w15: Q1.15@8920.87,11005 8985,11005 9010,10980 9010,10685 8960,10635 R8.1@8960,10583.46 8888.46,10583.46 8835,10530 8835,10322.19 U1.27@8961.67,10195.52
"SED DP": LED57.1 LED58.1 LED59.1 LED60.1 LED61.1 LED62.1 LED63.1 LED64.1 MAX1.22 | length 10723.1
  Top Layer w15: LED57.1@9556,10497.44 LED58.1@10445,10497.44 LED59.1@11334,10497.44 LED60.1@12223,10497.44 LED61.1@13112,10497.44 LED62.1@14001,10497.44 LED63.1@14890,10497.44 LED64.1@15779,10497.44 ; v1(11505,13900) 11505,13935 11570,14000 12280,14000 12330,13950 12330,13925 12355,13900 v1(12355,13890)
  Bottom Layer w15: v1(11505,13900) 11505,10500 v1(11510,10495) ; v1(12355,13890) 12455.87,13890 MAX1.22@12465.87,13900
  other v1: 11505,13900
"SED DP1": LED121.1 LED122.1 LED123.1 LED124.1 LED125.1 LED126.1 LED127.1 LED128.1 MAX2.22 | length 10810.1
  Top Layer w15: LED121.1@2444,10497.44 LED122.1@3333,10497.44 LED123.1@4222,10497.44 4224.44,10495 v1(4430,10495) 5108.56,10495 LED124.1@5111,10497.44 LED125.1@6000,10497.44 LED126.1@6889,10497.44 LED127.1@7778,10497.44 7862.44,10497.44 7965,10600 8500,10600 8602.56,10497.44 LED128.1@8667,10497.44 ; v1(4425,13900) 4425,13935 4490,14000 5200,14000 5250,13950 5250,13925 5275,13900 v1(5275,13890)
  Bottom Layer w15: v1(4425,13900) 4425,10500 v1(4430,10495) ; v1(5275,13890) 5375.87,13890 MAX2.22@5385.87,13900
"SED DP2": LED185.1 LED186.1 LED187.1 LED188.1 LED189.1 LED190.1 LED191.1 LED192.1 MAX3.22 | length 10704.1
  Top Layer w15: LED185.1@2444,3384.94 LED186.1@3333,3384.94 LED187.1@4222,3384.94 LED188.1@5111,3384.94 LED189.1@6000,3384.94 LED190.1@6889,3384.94 LED191.1@7778,3384.94 LED192.1@8667,3384.94 ; v1(4405,6790) 4490,6875 5100,6875 5240,6735 v1(5275,6735)
  Bottom Layer w15: v1(4405,6790) 4405,3390 v1(4410,3385) ; v1(5275,6735) MAX3.22@5385.87,6735
"SED DP3": LED249.1 LED250.1 LED251.1 LED252.1 LED253.1 LED254.1 LED255.1 LED256.1 MAX4.22 | length 10669.8
  Top Layer w15: LED249.1@9556,3384.94 LED250.1@10445,3384.94 LED251.1@11334,3384.94 LED252.1@12223,3384.94 LED253.1@13112,3384.94 LED254.1@14001,3384.94 LED255.1@14890,3384.94 LED256.1@15779,3384.94 ; v1(11525,6790) 11592.5,6857.5 12312.5,6857.5 v1(12375,6795)
  Bottom Layer w15: v1(11525,6790) 11525,3390 v1(11530,3385) ; v1(12375,6795) MAX4.22@12510.87,6795
"SEG A": LED1.1 LED2.1 LED3.1 LED4.1 LED5.1 LED6.1 LED7.1 LED8.1 MAX1.14 | length 9886.3
  Top Layer w15: LED1.1@9556,16720.44 LED2.1@10445,16720.44 LED3.1@11334,16720.44 v1(11950,16720.44) LED4.1@12223,16720.44 LED5.1@13112,16720.44 LED6.1@14001,16720.44 LED7.1@14890,16720.44 LED8.1@15779,16720.44
  Bottom Layer w15: v1(11950,16720.44) 11950,13624.64 12074.64,13500 MAX1.14@12465.87,13500
"SEG A1": LED65.1 LED66.1 LED67.1 LED68.1 LED69.1 LED70.1 LED71.1 LED72.1 MAX2.14 | length 9883.8
  Top Layer w15: LED65.1@2444,16720.44 LED66.1@3333,16720.44 LED67.1@4222,16720.44 LED68.1@5111,16720.44 LED69.1@6000,16720.44 LED70.1@6889,16720.44 LED71.1@7778,16720.44 LED72.1@8667,16720.44
  Bottom Layer w15: v1(4875,16720) 4875,13619.64 4994.64,13500 MAX2.14@5385.87,13500
"SEG A2": LED129.1 LED130.1 LED131.1 LED132.1 LED133.1 LED134.1 LED135.1 LED136.1 MAX3.14 | length 9926.6
  Top Layer w15: LED129.1@2444,9608.44 LED130.1@3333,9608.44 LED131.1@4222,9608.44 LED132.1@5111,9608.44 LED133.1@6000,9608.44 LED134.1@6889,9608.44 LED135.1@7778,9608.44 LED136.1@8667,9608.44
  Bottom Layer w15: v1(4855,9610) 4855,6509.64 5029.64,6335 MAX3.14@5385.87,6335
"SEG A3": LED193.1 LED194.1 LED195.1 LED196.1 LED197.1 LED198.1 LED199.1 LED200.1 MAX4.14 | length 9924.1
  Top Layer w15: LED193.1@9556,9608.44 LED194.1@10445,9608.44 LED195.1@11334,9608.44 LED196.1@12223,9608.44 LED197.1@13112,9608.44 LED198.1@14001,9608.44 LED199.1@14890,9608.44 LED200.1@15779,9608.44
  Bottom Layer w15: v1(11975,9610) 11975,6480 12060,6395 MAX4.14@12510.87,6395
"SEG B": LED9.1 LED10.1 LED11.1 LED12.1 LED13.1 LED14.1 LED15.1 LED16.1 MAX1.16 | length 8979.6
  Top Layer w15: LED9.1@9556,15840.94 LED16.1@15769.5,15840.94 ; v1(11880,13825) 12010,13825 v1(12060,13775)
  Bottom Layer w15: v1(11880,13825) v1(11880,15830) ; v1(12060,13775) 12060,13635 12095,13600 MAX1.16@12465.87,13600
  other v1: 11880,13825
"SEG B1": LED73.1 LED74.1 LED75.1 LED76.1 LED77.1 LED78.1 LED79.1 LED80.1 MAX2.16 | length 8989.1
  Top Layer w15: LED73.1@2444,15831.44 LED74.1@3333,15831.44 LED75.1@4222,15831.44 LED76.1@5111,15831.44 LED77.1@6000,15831.44 LED78.1@6889,15831.44 LED79.1@7778,15831.44 LED80.1@8667,15831.44 ; v1(4800,13825) 4930,13825 v1(4980,13775)
  Bottom Layer w15: v1(4800,13825) v1(4800,15830) ; v1(4980,13775) 4980,13635 5015,13600 MAX2.16@5385.87,13600
"SEG B2": LED137.1 LED138.1 LED139.1 LED140.1 LED141.1 LED142.1 LED143.1 LED144.1 MAX3.16 | length 8970.3
  Top Layer w15: LED137.1@2444,8719.44 LED138.1@3333,8719.44 LED139.1@4222,8719.44 LED140.1@5111,8719.44 LED141.1@6000,8719.44 LED142.1@6889,8719.44 LED143.1@7778,8719.44 LED144.1@8667,8719.44 ; v1(4780,6715) 4780,6680 4810,6650 5060,6650 v1(5275,6435)
  Bottom Layer w15: v1(4780,6715) v1(4780,8720) ; v1(5275,6435) MAX3.16@5385.87,6435
"SEG B3": LED201.1 LED202.1 LED203.1 LED204.1 LED205.1 LED206.1 LED207.1 LED208.1 MAX4.16 | length 8950.5
  Top Layer w15: LED201.1@9556,8719.44 LED202.1@10445,8719.44 LED203.1@11334,8719.44 LED204.1@12223,8719.44 LED205.1@13112,8719.44 LED206.1@14001,8719.44 LED207.1@14890,8719.44 LED208.1@15779,8719.44 ; v1(11900,6715) 11900,6680 11930,6650 12195,6650 v1(12300,6545)
  Bottom Layer w15: v1(11900,6715) v1(11900,8720) ; v1(12300,6545) 12350,6495 MAX4.16@12510.87,6495
"SEG C": LED17.1 LED18.1 LED19.1 LED20.1 LED21.1 LED22.1 LED23.1 LED24.1 MAX1.20 | length 7973.6
  Top Layer w15: LED17.1@9556,14942.44 LED18.1@10445,14942.44 LED19.1@11334,14942.44 LED20.1@12223,14942.44 LED21.1@13112,14942.44 LED22.1@14001,14942.44 LED23.1@14890,14942.44 LED24.1@15779,14942.44 ; v1(12355,13800) 12265,13890 12265,13925 12245,13945 v1@11810,13945 ; v1@11810,13945 v1(11805,13940) v1@11810,13945
  Bottom Layer w15: v1(11805,13940) v1(11805,14940) ; v1(12355,13800) MAX1.20@12465.87,13800
  other v1: 11805,13940
"SEG C1": LED81.1 LED82.1 LED83.1 LED84.1 LED85.1 LED86.1 LED87.1 LED88.1 MAX2.20 | length 7966.5
  Top Layer w15: LED81.1@2444,14942.44 LED82.1@3333,14942.44 LED83.1@4222,14942.44 LED84.1@5111,14942.44 LED85.1@6000,14942.44 LED86.1@6889,14942.44 LED87.1@7778,14942.44 LED88.1@8667,14942.44 ; v1(4725,13940) 4730,13945 5165,13945 5185,13925 5185,13890 v1(5275,13800)
  Bottom Layer w15: v1(4725,13940) v1(4725,14940) ; v1(5275,13800) MAX2.20@5385.87,13800
"SEG C2": LED145.1 LED146.1 LED147.1 LED148.1 LED149.1 LED150.1 LED151.1 LED152.1 MAX3.20 | length 8002.2
  Top Layer w15: LED145.1@2444,7830.44 LED146.1@3333,7830.44 LED147.1@4222,7830.44 LED148.1@5111,7830.44 LED149.1@6000,7830.44 LED150.1@6889,7830.44 LED151.1@7778,7830.44 LED152.1@8667,7830.44 ; v1(4705,6800) 5080,6800 5245,6635 v1(5275,6635)
  Bottom Layer w15: v1(4705,6800) v1(4705,7830) ; v1(5275,6635) MAX3.20@5385.87,6635
"SEG C3": LED209.1 LED210.1 LED211.1 LED212.1 LED213.1 LED214.1 LED215.1 LED216.1 MAX4.20 | length 7982.4
  Top Layer w15: LED209.1@9556,7830.44 LED210.1@10445,7830.44 LED211.1@11334,7830.44 LED212.1@12223,7830.44 LED213.1@13112,7830.44 LED214.1@14001,7830.44 LED215.1@14890,7830.44 LED216.1@15779,7830.44 ; v1(11825,6800) 11840,6785 12285,6785 v1(12375,6695)
  Bottom Layer w15: v1(11825,6800) v1(11825,7830) ; v1(12375,6695) MAX4.20@12510.87,6695
"SEG D": LED25.1 LED26.1 LED27.1 LED28.1 LED29.1 LED30.1 LED31.1 LED32.1 MAX1.23 | length 6441.6
  Top Layer w15: LED25.1@9556,14053.44 LED26.1@10445,14053.44 LED27.1@11334,14053.44 LED28.1@12223,14053.44 LED29.1@13112,14053.44 LED30.1@14001,14053.44 LED31.1@14890,14053.44 LED32.1@15779,14053.44
  Bottom Layer w15: v1(12355,14055) 12355,14005 12410,13950 MAX1.23@12500.87,13950
"SEG D1": LED89.1 LED90.1 LED91.1 LED92.1 LED93.1 LED94.1 LED95.1 LED96.1 MAX2.23 | length 6434.6
  Top Layer w15: LED89.1@2444,14053.44 LED90.1@3333,14053.44 LED91.1@4222,14053.44 LED92.1@5111,14053.44 LED93.1@6000,14053.44 LED94.1@6889,14053.44 LED95.1@7778,14053.44 LED96.1@8667,14053.44
  Bottom Layer w15: v1(5250,14055) 5250,14000 5300,13950 MAX2.23@5385.87,13950
"SEG D2": LED153.1 LED154.1 LED155.1 LED156.1 LED157.1 LED158.1 LED159.1 LED160.1 MAX3.23 | length 6492.5
  Top Layer w15: LED153.1@2444,6941.44 LED154.1@3333,6941.44 LED155.1@4222,6941.44 LED156.1@5111,6941.44 LED157.1@6000,6941.44 LED158.1@6889,6941.44 LED159.1@7778,6941.44 LED160.1@8667,6941.44
  Bottom Layer w15: v1(5245,6940) 5245,6830 5290,6785 MAX3.23@5385.87,6785
"SEG D3": LED217.1 LED218.1 LED219.1 LED220.1 LED221.1 LED222.1 LED223.1 LED224.1 MAX4.23 | length 6449.6
  Top Layer w15: LED217.1@9556,6941.44 LED218.1@10445,6941.44 LED219.1@11334,6941.44 LED220.1@12223,6941.44 LED221.1@13112,6941.44 LED222.1@14001,6941.44 LED223.1@14890,6941.44 LED224.1@15779,6941.44
  Bottom Layer w15: v1(12350,6940) 12350,6895 12400,6845 MAX4.23@12510.87,6845
"SEG E": LED33.1 LED34.1 LED35.1 LED36.1 LED37.1 LED38.1 LED39.1 LED40.1 MAX1.21 | length 7815.3
  Top Layer w15: LED33.1@9556,13164.44 LED34.1@10445,13164.44 LED35.1@11334,13164.44 LED36.1@12223,13164.44 LED37.1@13112,13164.44 LED38.1@14001,13164.44 LED39.1@14890,13164.44 LED40.1@15779,13164.44 ; v1(11730,13925) 11780,13975 12265,13975 12300,13940 12300,13899.04 12349.04,13850 v1(12355,13850)
  Bottom Layer w15: v1(11730,13165) v1(11730,13925) ; v1(12355,13850) MAX1.21@12465.87,13850
  other v1: 11730,13925
"SEG E1": LED97.1 LED98.1 LED99.1 LED100.1 LED101.1 LED102.1 LED103.1 LED104.1 MAX2.21 | length 7815.3
  Top Layer w15: LED97.1@2444,13164.44 LED98.1@3333,13164.44 LED99.1@4222,13164.44 LED100.1@5111,13164.44 LED101.1@6000,13164.44 LED102.1@6889,13164.44 LED103.1@7778,13164.44 LED104.1@8667,13164.44 ; v1(4650,13925) 4700,13975 5185,13975 5220,13940 5220,13899.04 5269.04,13850 v1(5275,13850)
  Bottom Layer w15: v1(4650,13165) v1(4650,13925) ; v1(5275,13850) MAX2.21@5385.87,13850
"SEG E2": LED161.1 LED162.1 LED163.1 LED164.1 LED165.1 LED166.1 LED167.1 LED168.1 MAX3.21 | length 7809.3
  Top Layer w15: LED161.1@2444,6052.44 LED162.1@3333,6052.44 LED163.1@4222,6052.44 LED164.1@5111,6052.44 LED165.1@6000,6052.44 LED166.1@6889,6052.44 LED167.1@7778,6052.44 LED168.1@8667,6052.44 ; v1(4630,6815) 4640,6815 4660,6835 5090,6835 5240,6685 v1(5275,6685)
  Bottom Layer w15: v1(4630,6055) v1(4630,6815) ; v1(5275,6685) MAX3.21@5385.87,6685
"SEG E3": LED225.1 LED226.1 LED227.1 LED228.1 LED229.1 LED230.1 LED231.1 LED232.1 MAX4.21 | length 7787.4
  Top Layer w15: LED225.1@9556,6052.44 LED226.1@10445,6052.44 LED227.1@11334,6052.44 LED228.1@12223,6052.44 LED229.1@13112,6052.44 LED230.1@14001,6052.44 LED231.1@14890,6052.44 LED232.1@15779,6052.44 ; v1(11750,6815) 11760,6815 11777.5,6832.5 12287.5,6832.5 v1(12375,6745)
  Bottom Layer w15: v1(11750,6055) v1(11750,6815) ; v1(12375,6745) MAX4.21@12510.87,6745
"SEG F": LED41.1 LED42.1 LED43.1 LED44.1 LED45.1 LED46.1 LED47.1 LED48.1 MAX1.15 | length 8913.8
  Top Layer w15: LED41.1@9556,12275.44 LED42.1@10445,12275.44 LED43.1@11334,12275.44 LED44.1@12223,12275.44 LED45.1@13112,12275.44 LED46.1@14001,12275.44 LED47.1@14890,12275.44 LED48.1@15779,12275.44 ; 11705,13700 v1(11655,13650) 11705,13700 ; 11705,13700 11980,13700 ; 11705,13700 11980,13700 ; 11980,13700 v1(12005,13675) 11980,13700
  Bottom Layer w15: v1(11655,12275) v1(11655,13650) ; v1(12005,13675) 12005,13605 12060,13550 MAX1.15@12465.87,13550
  other v1: 11655,13650 12005,13675
"SEG F1": LED105.1 LED106.1 LED107.1 LED108.1 LED109.1 LED110.1 LED111.1 LED112.1 MAX2.15 | length 8532.7
  Top Layer w15: LED105.1@2444,12275.44 LED106.1@3333,12275.44 LED107.1@4222,12275.44 LED108.1@5111,12275.44 LED109.1@6000,12275.44 LED110.1@6889,12275.44 LED111.1@7778,12275.44 LED112.1@8667,12275.44 ; v1(4575,13650) 4625,13700 4900,13700 v1(4925,13675)
  Bottom Layer w15: v1(4575,12275) v1(4575,13650) ; v1(4925,13675) 4925,13605 4980,13550 MAX2.15@5385.87,13550
"SEG F2": LED169.1 LED170.1 LED171.1 LED172.1 LED173.1 LED174.1 LED175.1 LED176.1 MAX3.15 | length 8575.5
  Top Layer w15: LED169.1@2444,5163.44 LED170.1@3333,5163.44 LED171.1@4222,5163.44 LED172.1@5111,5163.44 LED173.1@6000,5163.44 LED174.1@6889,5163.44 LED175.1@7778,5163.44 LED176.1@8667,5163.44 ; v1(4555,6540) 4605,6590 4880,6590 v1(4905,6565)
  Bottom Layer w15: v1(4555,5165) v1(4555,6540) ; v1(4905,6565) 4905,6495 5015,6385 MAX3.15@5385.87,6385
"SEG F3": LED233.1 LED234.1 LED235.1 LED236.1 LED237.1 LED238.1 LED239.1 LED240.1 MAX4.15 | length 8555.6
  Top Layer w15: LED233.1@9556,5163.44 LED234.1@10445,5163.44 LED235.1@11334,5163.44 LED236.1@12223,5163.44 LED237.1@13112,5163.44 LED238.1@14001,5163.44 LED239.1@14890,5163.44 LED240.1@15779,5163.44 ; v1(11675,6540) 11725,6590 12000,6590 v1(12025,6565)
  Bottom Layer w15: v1(11675,5165) v1(11675,6540) ; v1(12025,6565) 12025,6495 12075,6445 MAX4.15@12510.87,6445
"SEG G": LED49.1 LED50.1 LED51.1 LED52.1 LED53.1 LED54.1 LED55.1 LED56.1 MAX1.17 | length 9742.1
  Top Layer w15: LED49.1@9556,11386.44 LED50.1@10445,11386.44 LED51.1@11334,11386.44 LED52.1@12223,11386.44 LED53.1@13112,11386.44 LED54.1@14001,11386.44 LED55.1@14890,11386.44 LED56.1@15779,11386.44 ; v1(11605,13875) 12230,13875 v1(12355,13750)
  Bottom Layer w15: v1(11580,11385) 11580,13850 ; v1(12355,13750) 12380,13725 12380,13675 12405,13650 MAX1.17@12465.87,13650 ; 11580,13850 v1(11605,13875) 11580,13850
  other v1: 11605,13875
"SEG G1": LED113.1 LED114.1 LED115.1 LED116.1 LED117.1 LED118.1 LED119.1 LED120.1 MAX2.17 | length 9706.7
  Top Layer w15: LED113.1@2444,11386.44 LED114.1@3333,11386.44 LED115.1@4222,11386.44 LED116.1@5111,11386.44 LED117.1@6000,11386.44 LED118.1@6889,11386.44 LED119.1@7778,11386.44 LED120.1@8667,11386.44 ; v1(4525,13875) 5150,13875 v1(5275,13750)
  Bottom Layer w15: v1(4500,11385) 4500,13850 v1(4525,13875) ; v1(5275,13750) 5300,13725 5300,13675 5325,13650 MAX2.17@5385.87,13650
"SEG G2": LED177.1 LED178.1 LED179.1 LED180.1 LED181.1 LED182.1 LED183.1 LED184.1 MAX3.17 | length 9720.2
  Top Layer w15: LED177.1@2444,4274.44 LED178.1@3333,4274.44 LED179.1@4222,4274.44 LED180.1@5111,4274.44 LED181.1@6000,4274.44 LED182.1@6889,4274.44 LED183.1@7778,4274.44 LED184.1@8667,4274.44 ; v1(4505,6765) 4510,6760 5000,6760 v1(5275,6485)
  Bottom Layer w15: v1(4480,4275) 4480,6740 v1(4505,6765) ; v1(5275,6485) MAX3.17@5385.87,6485
"SEG G3": LED241.1 LED242.1 LED243.1 LED244.1 LED245.1 LED246.1 LED247.1 LED248.1 MAX4.17 | length 9753.1
  Top Layer w15: LED241.1@9556,4274.44 LED242.1@10445,4274.44 LED243.1@11334,4274.44 LED244.1@12223,4274.44 LED245.1@13112,4274.44 LED246.1@14001,4274.44 LED247.1@14890,4274.44 LED248.1@15779,4274.44 ; v1(11625,6765) 11630,6760 12250,6760 12300,6710 12300,6620 v1(12375,6545)
  Bottom Layer w15: v1(11600,4275) 11600,6740 v1(11625,6765) ; v1(12375,6545) MAX4.17@12510.87,6545
TX: JP2.4 U1.31 | length 1184
  Top Layer w15: JP2.4@7985,10200 8110,10200 8295,10385 v1(8905,10385)
  Bottom Layer w15: v1(8905,10385) 8950.36,10385 U1.31@9050.75,10284.6
VCC#1: C1.2 C13.1 C14.1 Cp1.1 MAX1.19 R1.2 Rset01.1 VR1.2 VR1.4 | length 7622.8
  Top Layer w15: v1(12340,13230) 12375,13265 v1(12540,13265)
  Bottom Layer w15: 9605,9464.17 R1.2@9785.71,9464.17 ; R1.2@9786.54,9465 9786.54,9586.54 10505,10305 11930,10305 12340,10715 v1(12340,13230) ; MAX1.19@12500.87,13750 12670,13750 12754.57,13665.43 C14.1@12754.57,13335 ; v1(12540,13265) 12668.46,13265 Rset01.1@12675,13271.54
  Bottom Layer w30: 9605,9464.17 9605,9235.83 9605,9230.83 ; 9610,9235.83 9605,9230.83 ; C1.2@9790,9064.57 9720.43,9064.57 9680,9105 Cp1.1@9605,9105 9605,9230.83 ; C13.1@12600.43,13335 12600.43,13299.57 12628.46,13271.54 Rset01.1@12675,13271.54 12721.54,13271.54 12754.57,13304.57 C14.1@12754.57,13335
VCC#2: C2.2 C15.1 C16.1 Cp2.1 MAX2.19 R2.2 Rset02.1 VR2.2 VR2.4 | length 8031.1
  Top Layer w15: v1(5700,13290) 5750,13290 v1(5830,13210)
  Bottom Layer w15: MAX2.19@5385.87,13750 5575,13750 5649.57,13675.43 C15.1@5649.57,13355 ; 5633.46,13296.54 5640,13290 v1(5700,13290) ; v1(5830,13210) 5830,10490 6060,10260 6990,10260 7615,9635 8700,9635 8816.54,9518.46 R2.2@8816.54,9465 8815.71,9464.17 VR2.4@8625,9464.17
  Bottom Layer w30: C16.1@5480.43,13355 5480.43,13310.43 5494.33,13296.54 Rset02.1@5565,13296.54 5633.46,13296.54 5649.57,13312.64 C15.1@5649.57,13355 ; VR2.4@8625,9464.17 VR2.2@8625,9235.83 Cp2.1@8625,9105 8700,9105 8740.43,9064.57 C2.2@8810,9064.57
VCC#3: C3.2 C17.1 C18.1 Cp3.1 MAX3.19 R3.2 Rset03.1 VR3.2 VR3.4 | length 7682.4
  Top Layer w15: v1(5550,7000) 5550,7005 5585,7040 v1(5730,7040)
  Bottom Layer w15: MAX3.19@5385.87,6585 5530,6585 ; v1(5550,7000) 5550,6605 5530,6585 ; C17.1@5634.57,6190 5634.57,6239.57 5585,6289.13 5585,6530 5530,6585 ; v1(5730,7040) 5755,7065 5755,9630 6025,9900 6975,9900 7310,9565 8255,9565 8316.54,9503.46 R3.2@8316.54,9465 ; VR3.4@8135,9464.17 R3.2@8315.71,9464.17
  Bottom Layer w30: C18.1@5475.43,6190 5475.43,6154.57 5503.46,6126.54 Rset03.1@5560,6126.54 5616.54,6126.54 5634.57,6144.57 C17.1@5634.57,6190 ; VR3.4@8135,9464.17 VR3.2@8135,9235.83 Cp3.1@8135,9105 8210,9105 8250.43,9064.57 C3.2@8320,9064.57
VCC#4: C4.2 C19.1 C20.1 Cp4.1 MAX4.19 R4.2 Rset04.1 VR4.2 VR4.4 | length 7307.8
  Bottom Layer w15: R4.2@10280.71,9449.17 10095,9449.17 VR4.4@10095,9464.17 10095,9780 10120,9805 11850,9805 12050,9605 12050,6770 12175,6645 MAX4.19@12510.87,6645 12639.04,6645 12710,6574.04 12710,6340 12759.57,6290.43 C19.1@12759.57,6250
  Bottom Layer w30: Cp4.1@10093.75,9090 10095,9091.25 Cp4.1@10095,9105 VR4.2@10095,9235.83 VR4.4@10095,9449.17 ; Cp4.1@10095,9090 10170,9090 10210.43,9049.57 C4.2@10280,9049.57 ; C20.1@12605.43,6250 12605.43,6200.43 12619.33,6186.54 Rset04.1@12685,6186.54 12738.46,6186.54 12760,6208.07 12760,6249.57 C19.1@12759.57,6250
VCC#5: ALT.1 C5.2 C6.1 C7.1 C9.2 Cp5.1 HOUR.1 J1.2 JP2.3 MINUTE.1 Photo.1 Q1.2 R5.2 R7.1 R8.2 R9.1 U1.4 U1.6 U1.18 VR5.2 VR5.4 | length 9644.2
  Top Layer w15: JP2.3@7985,10300 8110,10300 8235,10425 v1(8730,10425) 8930,10425 v1(8935,10430) ; v1(9730,9575) v1(9935,9575) 10335,9575 10375,9535 v1(10535,9535) ; J1.2@10120,10070 10165,10025 v1(10165,9895)
  Bottom Layer w15: v1(8730,10425) 8685,10470 8685,12775 9060,13150 ; v1(8935,10430) 8935,10450 8960,10475 R8.2@8960,10516.54 R7.1@9060,10516.54 9140,10516.54 ; U1.6@9262.33,10195.52 9262.33,10191.03 9240.96,10169.67 9240.96,10085.96 9196.42,10041.42 ; Q1.2@9279.13,11005 9185,11005 9110,10930 9110,10546.54 9140,10516.54 ; R5.2@9320.71,9459.17 9115,9459.17 9110.43,9463.74 C7.1@9110.43,9615 C6.1@9110.43,9725 ; v1(9730,9575) 9225,9575 9175,9625 9175,9705 9155,9725 C6.1@9110.43,9725 ; v1(9935,9575) 10050,9690 10050,9780 v1(10165,9895) ; v1(10535,9535) 10810,9535 10845,9500 ; C6.1@9110.43,9725 9110.43,9789.57 9075,9825 9054.64,9825 9020,9859.64 9020,9904.16 9076.6,9960.77 9115.77,9960.77 9196.42,10041.42 ; 9140,10516.54 R9.1@9170,10516.54 9178.03,10524.57 C9.2@9285,10524.57 9285,10307.27 U1.4@9217.79,10240.06 9217.79,10235.58 9196.42,10214.21 9196.42,10144.54 9207.5,10133.46 9207.5,10106.54 9196.42,10095.46 9196.42,10041.42
  Bottom Layer w30: VR5.4@9115,9459.17 VR5.2@9115,9235.83 9115,9100 9195,9100 9235.43,9059.57 C5.2@9300,9059.57
VINP: Cp6.1 D1.2 VR1.3 VR2.3 VR3.3 VR4.3 VR5.3 | length 3704.4
  Bottom Layer w30: VR3.3@8044.45,9235.83 8044.45,9060.55 8105,9000 8595,9000 ; VR2.3@8534.45,9235.83 8534.45,9060.55 8595,9000 ; D1.2@8895,8708.23 9023.23,8708.23 9040,8725 Cp6.1@9119.38,8725 9180,8725 9180,8730 9210,8760 9210,8945 ; VR5.3@9024.45,9230.83 9024.45,9055.55 9080,9000 ; 9514.45,9235.83 9514.45,9059.45 9450,8995 ; VR4.3@10004.45,9220.83 10004.45,9049.45 9950,8995 9450,8995 ; 8595,9000 9080,9000 ; 9080,9000 9155,9000 9210,8945 ; 9210,8945 9260,8995 9450,8995
pads on no net: 16Mhz.0 ALT.0 HOUR.0 MAX4.24 MINUTE.0 Q1.1 Q1.3 S1.3 S1.4 U1.19 U1.22

## Keep-outs
Keep-Out Layer:
  lines w10: 2050,3050 16174,3050 16174,17174 2050,17174 2050,3050

## Silkscreen, mask and mechanical layers (free items; w line width, h text height)
Bottom Overlay:
  text "06" at 9410.01,10850 h60 r270
  text "02" at 9510.01,10850 h60 r270
  text "04" at 9610.01,10850 h60 r270
  text "10" at 9710.01,10850 h60 r270
  text "11" at 9810.01,10850 h60 r270
  text "32" at 9910.01,10850 h60 r270
  text "GND" at 7910,10470 h60
  text "GND" at 7910,10370 h60
  text "VCC 5" at 7910,10270 h60
  text "GND" at 10330,10235 h50
  text "RST" at 9960,10230 h50
  text "TX" at 7910,10170 h60
  text "SCK" at 9960,10135 h50
  text "MOSI" at 10370,10125 h50
  text "RX" at 7905,10070 h60
  text "MISO" at 9960,10035 h50
  text "VCC 5" at 10435,10030 h50
  text "DTR" at 7905,9970 h60
  text "+" at 9000,8365 h60
Drill Drawing:
  text ".LEGEND" at 16530,3160 h60
  text "Drill Drawing." at 16420,3035 h60

## Dimensions
2050,3050 to 16174,3050 on Mechanical 1
2050,3050 to 2050,17174 on Mechanical 1

## Text inside footprints (layer, text, board x,y; h text height)
BATTERY: Bottom Overlay "C2032" at 8875,11845 h60 r270
J1: Bottom Overlay "1" at 10000,9990 h50 r270; Bottom Overlay "2" at 10100,9970 h50 r270; Bottom Overlay "5" at 10000,10330 h50 r270; Bottom Overlay "6" at 10100,10330 h50 r270